# EAGLE board rolety (EAGLE 6.3)

Size 23.8 x 43.84 mm. Coordinates in mm from the lower left corner, seen from the top.
Outline: 0,0 23.8,0 23.8,43.76 0,43.84 0,0
Copper layers (1*16): Top 0.035mm / dielectric 1.5mm / Bottom 0.035mm
Design rules "default": minimum track width 10mil, minimum drill 24mil, track to track 8mil, track to pad 8mil, pad to pad 8mil, via to via 8mil, smd to smd 8mil, copper to edge 40mil, drill to drill 8mil, minimum pad ring 10mil, minimum via ring 8mil, stop-mask expansion 4mil, vias tented up to drill 0mil, thermal gap 10mil

## Footprints (pad centres in the part's own frame; a part is rotated, then mirrored left to right if it is on the bottom)
TO-269AA = smd 1 x 1.25: + -1.28,-2.855; - 1.28,-2.855; AC1 -1.28,2.855; AC2 1.28,2.855
E5-13 = drill 1.016 pad 2.54: + -2.54,0 | drill 1.016 pad 2.54 octagon: - 2.54,0
C2012 = smd 1.3 x 1.5: 1 -0.85,0; 2 0.85,0
E2,5-5 = drill 0.813 pad 1.6: + -1.27,0 | drill 0.813 pad 1.6 octagon: - 1.27,0
SMA = smd 2 x 2: A 2,0; C -2,0
DO214AA = smd 1.8 x 2.2: A 2.55,0; C -2.55,0
SO-8C = smd 0.6 x 2: BP -1.905,-2; D 1.905,-2; FB -0.635,-2 | smd 4.41 x 2: S 0,2
SOT223 = smd 1.219 x 2.235: 1 -2.311,-3.099; 2 0,-3.099; 3 2.311,-3.099 | smd 3.6 x 2.2: 4 0,3.099
1X04 = drill 1.016 long: 1 -3.81,0; 2 -1.27,0; 3 1.27,0; 4 3.81,0
1X05 = drill 1.016 long: 1 -5.08,0; 2 -2.54,0; 3 0,0; 4 2.54,0; 5 5.08,0
FRS1B = drill 0.914 long: 1 0,3.81; 2 0,-3.81; O -2.54,-3.81; P 10.16,3.81; P@ 10.16,-3.81; S -2.54,3.81
BC12 = drill 0.914 long: 1 -6.35,0; 2 6.35,0
R2512W = smd 2 x 2.1: 1 -2.896,0; 2 2.896,0
M2012 = smd 1.3 x 1.6: 1 -0.95,0; 2 0.95,0
SD4-01 = drill 0.813 long: 1 0,-3.81; 2 0,3.81
SOT23 = smd 1 x 1.4: 1 -0.95,-1.1; 2 0.95,-1.1; 3 0,1.1
RFM70 = smd 0.85 x 1.5: CE 2.5,-14.3; CSN 3.8,-14.3; GND -0.1,-14.3; IRQ 9,-14.3; MISO 7.7,-14.3; MOSI 6.4,-14.3; SCK 5.1,-14.3; VDD 1.2,-14.3
SSOP20 = smd 0.4 x 1.5: 1 -2.925,-3.625; 2 -2.275,-3.625; 3 -1.625,-3.625; 4 -0.975,-3.625; 5 -0.325,-3.625; 6 0.325,-3.625; 7 0.975,-3.625; 8 1.625,-3.625; 9 2.275,-3.625; 10 2.925,-3.625; 11 2.925,3.625; 12 2.275,3.625; 13 1.625,3.625; 14 0.975,3.625; 15 0.325,3.625; 16 -0.325,3.625; 17 -0.975,3.625; 18 -1.625,3.625; 19 -2.275,3.625; 20 -2.925,3.625

## Placement (x,y rotation side)
B1  RECTIFIER  [TO-269AA]  21.28,15.34 0 bottom
C1  3,3uF  [E5-13]  7.2,29.27 90 top
C2  100nF  [C2012]  9.85,35.75 0 bottom
C3  10uF / 16 V  [E2,5-5]  21.25,2.54 0 top
C4  100uF / 6,3 V  [E2,5-5]  15.92,2.54 0 top
C5  100nF  [C2012]  -17.78,60.96 0 top  (outside the outline)
D1  MBRA340T3  [SMA]  6.35,11.43 90 bottom
D2  MBRA340T3  [SMA]  17.78,8.89 90 bottom
D3  [DO214AA]  4.98,37.06 270 bottom
D4  [DO214AA]  1.54,35.43 270 bottom
IC1  LNK304  [SO-8C]  21.15,26.15 0 bottom
IC2  MCP1703DB  [SOT223]  13.39,26.04 270 bottom
JP1  [1X04]  6.77,2.79 0 top
JP2  [1X05]  16.71,41.96 0 top
K2  FRS1B  [FRS1B]  17.78,10.16 90 top
K3  FRS1B  [FRS1B]  6.35,10.16 90 bottom
L1  BC12  [BC12]  16.04,38.06 0 top
R1  100  [R2512W]  13.97,16.51 0 bottom
R2  8,2  [R2512W]  5.08,16.51 0 bottom
R3  3.9 k  [M2012]  -31.75,60.96 0 top  (outside the outline)
R4  2,05 k  [M2012]  -25.4,60.96 0 top  (outside the outline)
R5  1 K  [M2012]  -36.83,60.96 0 top  (outside the outline)
R6  1 K  [M2012]  -41.91,60.96 0 top  (outside the outline)
R7  2 K  [M2012]  -46.99,60.96 0 top  (outside the outline)
S1  [SD4-01]  5.03,41.14 90 top
T1  BC846  [SOT23]  3.3,29.5 0 bottom
T2  BC846  [SOT23]  3.71,24.48 0 bottom
U$1  RFM70  [RFM70]  26.59,33.52 270 top
U$2  PIC16F690  [SSOP20]  17.01,34.8 0 bottom

## Library data of the parts
B1 = rectifier
C1-C5 R1-R7 = resistor
D1-D4 = diode
IC1 = powerint
IC2 = linear
JP1 JP2 = pinhead
K2 K3 = relay; OC_FARNELL: unknown; OC_NEWARK: unknown
L1 = inductors
S1 = switch-dil; OC_FARNELL: unknown; OC_NEWARK: unknown
T1 T2 = transistor
U$1 = rfm70
U$2 = microchip

## Nets
N$1: IC1.D R1.2
N$2: B1.+ C1.+ R1.1
N$3: B1.AC1 R2.2
N$4: B1.AC2 JP1.2
N$5: B1.- C1.- C4.- C5.1 D3.A IC2.2 JP2.3 R7.1 S1.1 T1.2 T2.2 U$1.GND U$2.20
N$6: JP1.3 K3.S
N$8: JP1.4 K2.S
N$9: C3.+ D4.C R3.1
N$10: C2.1 IC1.BP
N$11: IC1.FB R3.2 R4.1
N$12: U$1.MISO U$2.13
N$13: C2.2 C3.- D3.C IC1.S L1.1 R4.2
N$14: D1.A K3.2 T1.3
N$15: R5.1 T1.1
N$16: U$1.CE U$2.17
N$17: C5.2 IC2.3 JP2.2 U$1.VDD U$2.1
N$18: JP2.4 U$2.19
N$19: JP2.5 U$2.18
N$20: U$1.CSN U$2.16
N$21: U$1.IRQ U$2.14
N$22: U$1.SCK U$2.11
N$23: U$1.MOSI U$2.9
N$25: JP2.1 U$2.4
N$26: C4.+ D1.C D2.C D4.A IC2.1 K2.1 K3.1 L1.2 R7.2
N$27: D2.A K2.2 T2.3
N$28: U$2.8
N$29: U$2.5
N$30: U$2.6
N$31: U$2.7
N$33: S1.2 U$2.10
N$34: U$2.12
N$35: R5.2 U$2.3
N$36: JP1.1 K2.P K2.P@ K3.P K3.P@ R2.1
N$37: R6.1 T2.1
N$38: R6.2 U$2.2

## Tracks (layer width: path | path; a pad name or v marks a point on that pad's centre or on a via)
N$1  (1 unrouted)
N$2  (2 unrouted)
N$3  (1 unrouted)
N$4  (1 unrouted)
N$5  (12 unrouted)
N$6  (1 unrouted)
N$8  (1 unrouted)
N$9  (2 unrouted)
N$10  (1 unrouted)
N$11  (2 unrouted)
N$12  (1 unrouted)
N$13  (5 unrouted)
N$14  (2 unrouted)
N$15  (1 unrouted)
N$16  (1 unrouted)
N$17  (4 unrouted)
N$18  (1 unrouted)
N$19  (1 unrouted)
N$20  (1 unrouted)
N$21  (1 unrouted)
N$22  (1 unrouted)
N$23  (1 unrouted)
N$25  (1 unrouted)
N$26  (8 unrouted)
N$27  (2 unrouted)
N$33  (1 unrouted)
N$35  (1 unrouted)
N$36  (5 unrouted)
N$37  (1 unrouted)
N$38  (1 unrouted)